# EAGLE board 2019-11-10_03-39-04 (EAGLE 6.4)
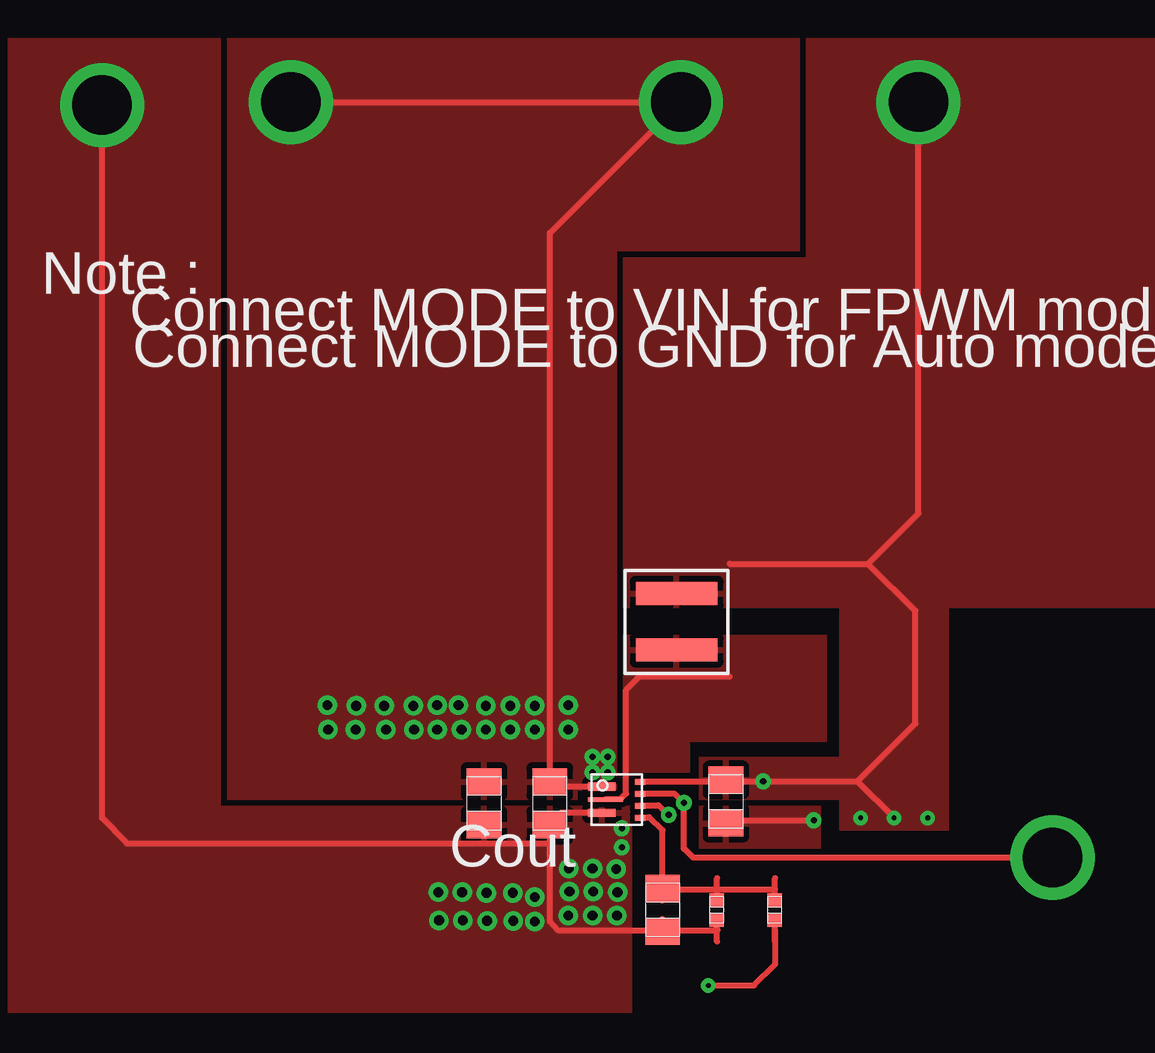
[diagram p0: board, top side]
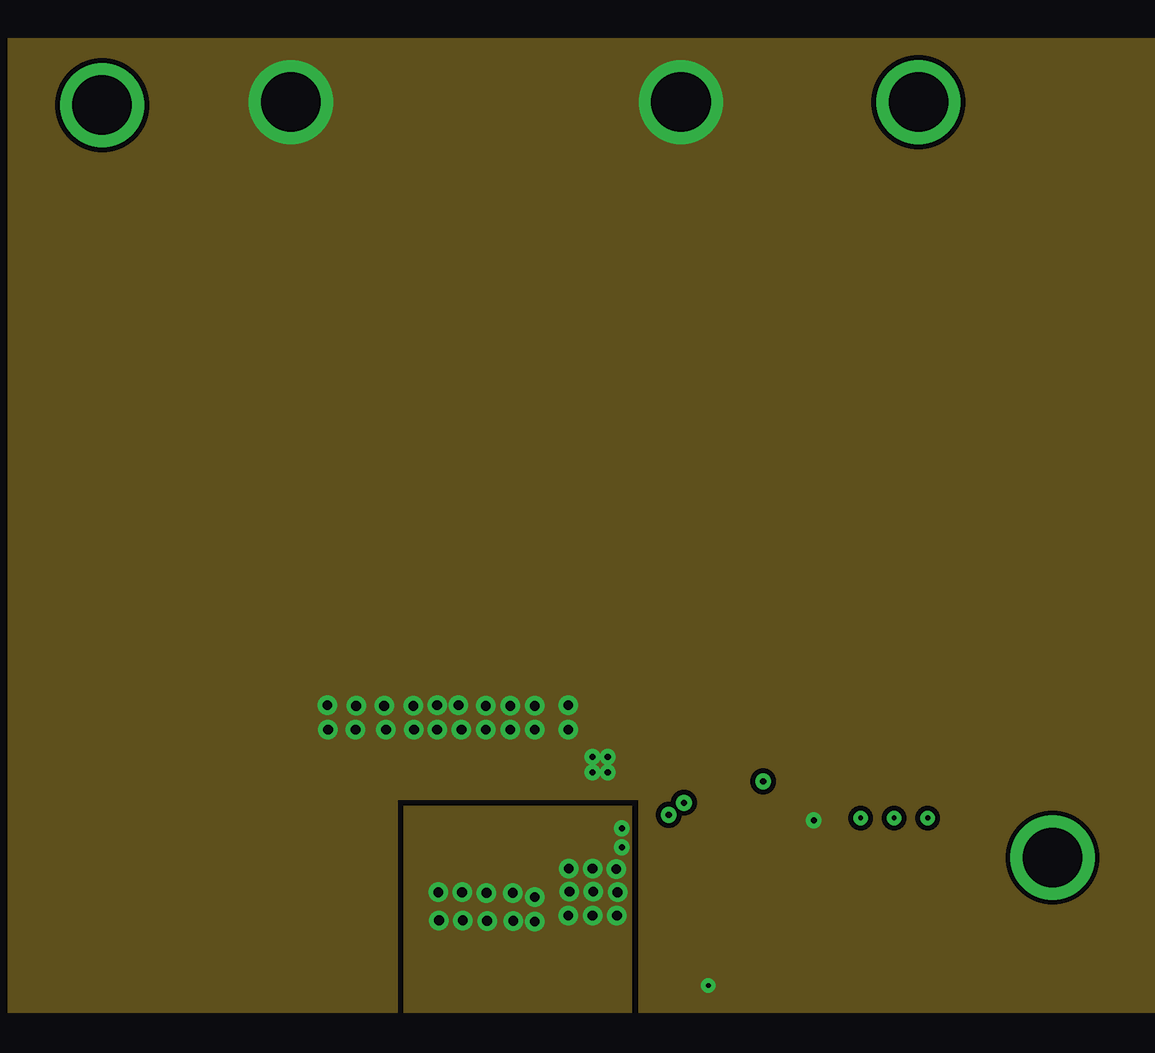
[diagram p1: board, inner layer INTERNAL1]
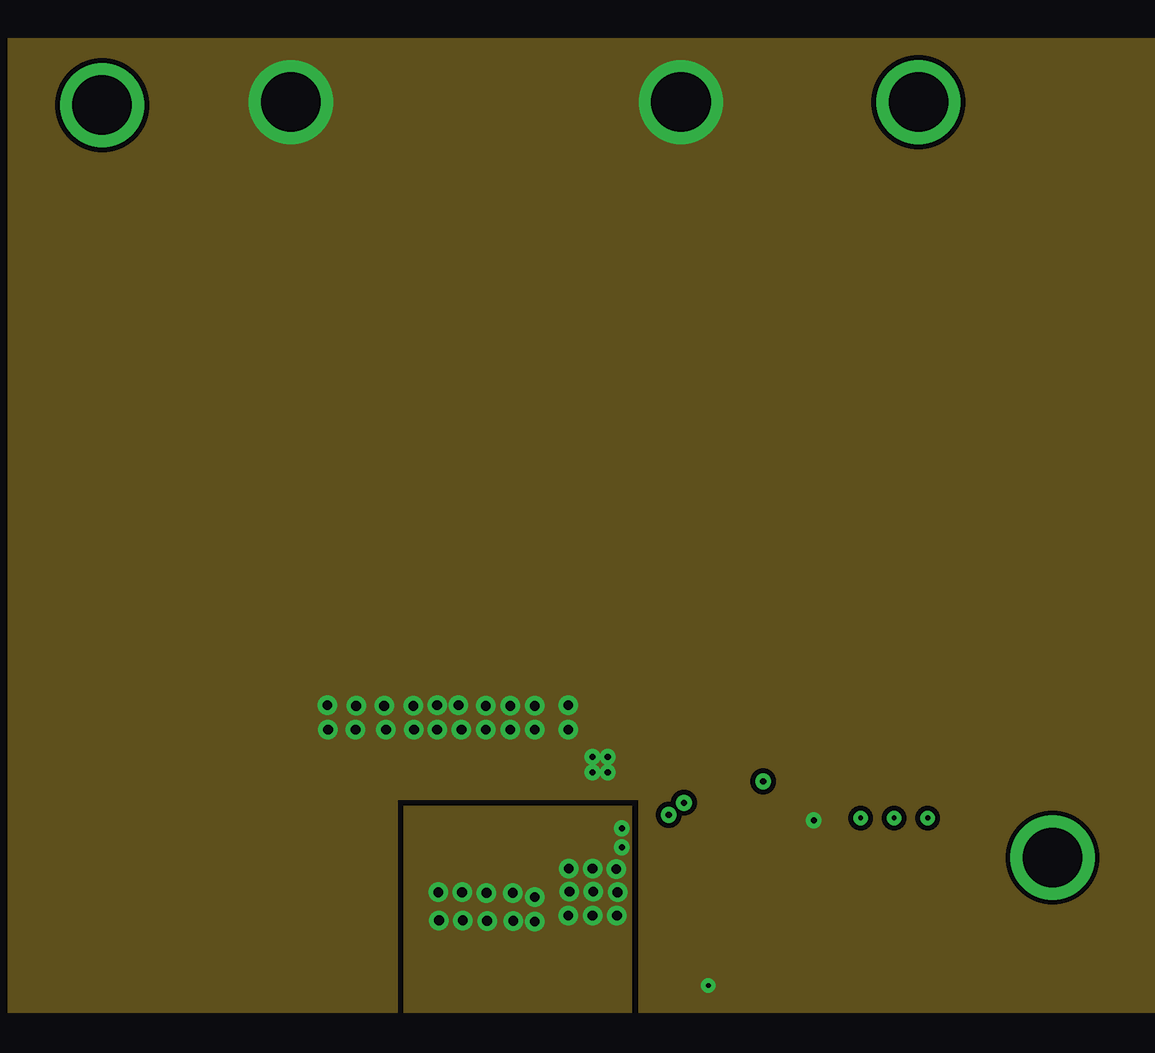
[diagram p2: board, inner layer INTERNAL2]
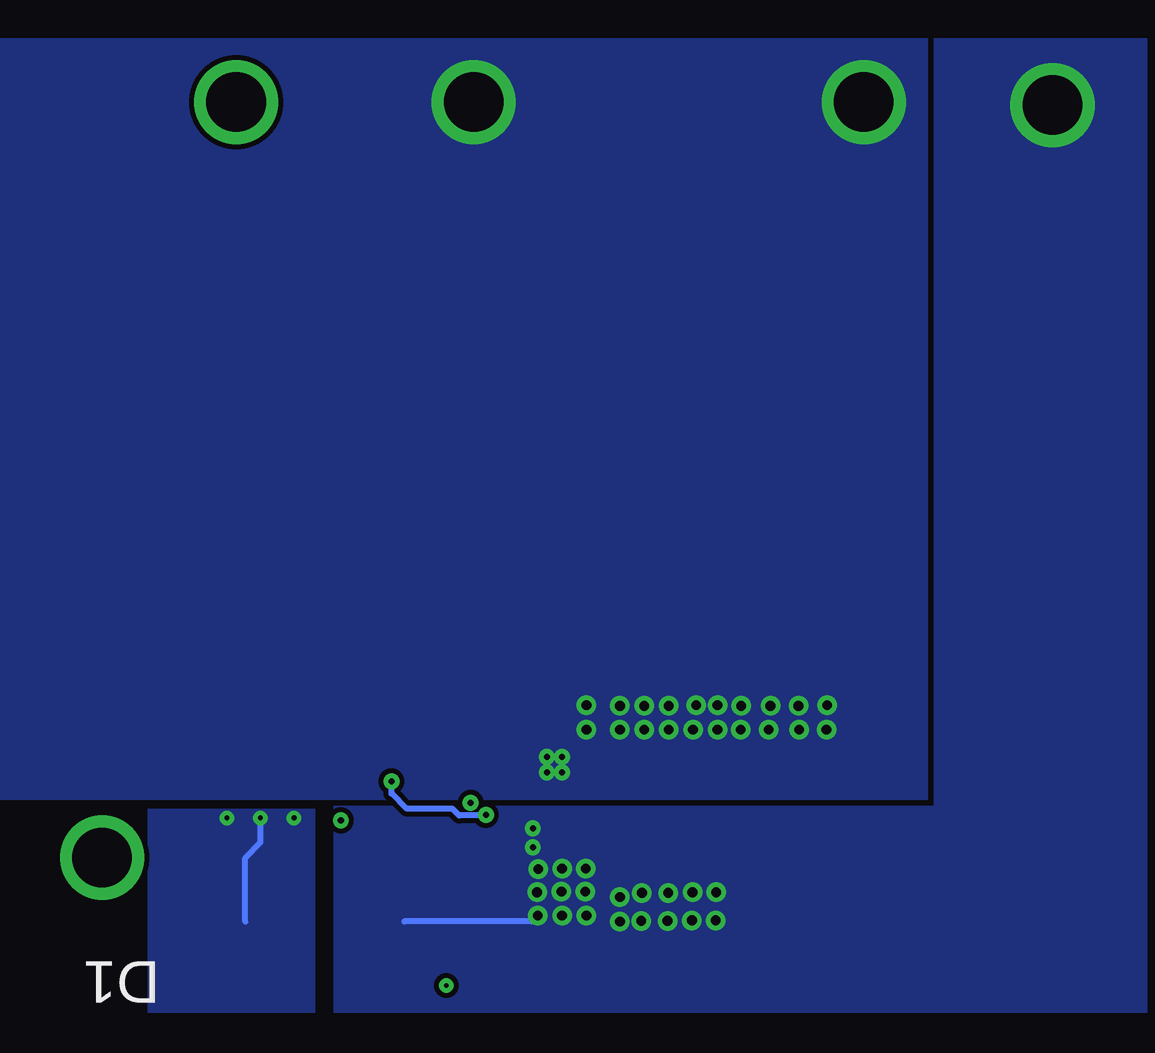
[diagram p3: board, bottom side, seen from below]

No outline drawn. Coordinates in mm, seen from the top.
Copper layers ((1*2)+(15*16)): TOP / INTERNAL1 / layer 15 / BOTTOM

## Footprints (pad centres in the part's own frame; a part is rotated, then mirrored left to right if it is on the bottom)
0805 = smd 1.118 x 1.448: 1 -0.902,0; 2 0.902,0
TP-1502 = drill 0.813 round: 1 0,0
XFL4020 = smd 0.965 x 3.404: 1 -1.181,0; 2 1.181,0
0402 = smd 0.559 x 0.61: 1 -0.419,0; 2 0.419,0
RWU0007A = smd 1.15 x 0.35: 1 -0.625,0.55; 3 -0.625,-0.55 | smd 1.45 x 0.2: 2 -0.475,0 | smd 0.45 x 0.25: 4 0.975,-0.75; 5 0.975,-0.25; 6 0.975,0.25; 7 0.975,0.75

## Placement (x,y rotation side)
Cff  [0805]  57.78,32.23 90 top
Cin  [0805]  60.43,36.75 270 top
Cout_1  [0805]  53.09,36.68 90 top
Cout_2  [0805]  50.34,36.68 90 top
GND  [TP-1502]  58.55,65.89 180 top
GND1  [TP-1502]  42.27,65.89 180 top
L1  [XFL4020]  58.37,44.25 270 top
MODE  [TP-1502]  74.02,34.39 0 top
Rfbb  [0402]  62.46,32.23 270 top
Rfbt  [0402]  60.05,32.23 90 top
U1  [RWU0007A]  55.88,36.83 0 top
VIN  [TP-1502]  68.43,65.89 180 top
VOUT  [TP-1502]  34.39,65.79 180 top

## Library data of the parts
Cff = ultra-librarian; RefDes: Cff; Type: C0805C475K8PACTU
Cin = ultra-librarian; RefDes: Cin; Type: C0805C106K8PACTU
Cout_1 Cout_2 = ultra-librarian
GND = ultra-librarian; RefDes: GND; Type: TP-1502
GND1 = ultra-librarian; RefDes: GND1; Type: TP-1502
L1 = ultra-librarian; RefDes: L1; Type: XFL4020-102MEB
MODE = ultra-librarian; RefDes: MODE; Type: TP-1502
Rfbb = ultra-librarian; RefDes: Rfbb; Type: CRCW0402100KFKED
Rfbt = ultra-librarian; RefDes: Rfbt; Type: CRCW0402732KFKED
U1 = ultra-librarian; RefDes: U1; Type: TPS61022RWUR
VIN = ultra-librarian; RefDes: VIN; Type: TP-1502
VOUT = ultra-librarian; RefDes: VOUT; Type: TP-1502

## Nets
0: Cin.2 Cout_1.2 Cout_2.2 GND1.1 GND.1 Rfbb.2 U1.1
2: Cin.1 L1.1 U1.5 U1.7 VIN.1
3: Cff.2 Rfbb.1 Rfbt.2 U1.4
5: Cff.1 Cout_1.1 Cout_2.1 Rfbt.1 U1.3 VOUT.1
8: MODE.1 U1.6
12: L1.2 U1.2

## Tracks (layer width: path | path; a pad name or v marks a point on that pad's centre or on a via)
0  (via drill 0.2 pad 0.51, 0.25 pad 0.51, 0.41 pad 0.81, 2.49 pad 3.48)
  TOP 0.254: U1.1 53.65,37.39 53.09,37.97 53.09,38.38 53.09,60.45 v58.55,65.91 v42.29,65.91 | v59.69,29.08 61.59,29.08 62.48,29.97 62.48,31.39 | 60.45,35.97 v64.08,35.97 | 62.47,30.91 62.47,31.85
  other vias: 55.5,37.97 49.4,39.75 53.85,39.75 47.42,39.75 51.44,39.75 43.84,39.75 55.5,38.61 47.4,40.74 51.44,40.74 53.85,40.77 49.28,40.77 43.81,40.77 54.86,37.97 50.42,39.75 48.39,39.75 46.25,39.75 52.45,39.75 44.98,39.75 54.86,38.61 45.01,40.74 46.18,40.74 48.39,40.77 52.45,40.74 50.42,40.74
  pour TOP (rank 6): 54.23,37.21 54.23,36.83 39.62,36.83 39.62,68.58 63.5,68.58 63.5,59.69 55.88,59.69 55.88,37.21
  pour TOP (rank 6): 59.31,34.8 59.31,36.58 64.39,36.58 64.39,34.8
  pour BOTTOM (rank 5): 78.74,36.83 39.62,36.83 39.62,68.58 78.74,68.58
  pour INTERNAL2 (rank 4): 56.77,27.94 56.77,36.83 46.74,36.83 46.74,27.94 30.48,27.94 30.48,68.58 78.74,68.58 78.74,27.94
  pour INTERNAL1 (rank 5): 56.77,27.94 56.77,36.83 46.74,36.83 46.74,27.94 30.48,27.94 30.48,68.58 78.74,68.58 78.74,27.94
2  (via drill 0.2 pad 0.51, 0.25 pad 0.51, 2.49 pad 3.48)
  TOP 0.254: 60.48,37.59 v61.98,37.59 65.91,37.59 | 65.91,37.59 v67.44,36.07 | v58.04,36.2 57.61,36.6 56.87,36.6 | 56.87,37.59 60.45,37.59 | 66.34,46.66 68.33,44.7 68.33,40.01 65.91,37.59 | 60.58,46.66 66.34,46.66 | v68.45,65.91 68.45,48.77 66.34,46.66
  BOTTOM 0.254: v61.98,37.59 61.98,37.08 61.34,36.45 59.44,36.45 59.16,36.17 58.06,36.17 v58.04,36.2 | v67.44,36.07 67.44,35.05 68.07,34.39 68.07,31.75
  other vias: 66.04,36.07 68.83,36.07
  pour TOP (rank 3): 65.15,38.61 59.31,38.61 59.31,36.83 65.15,36.83 65.15,35.56 69.72,35.56 69.72,44.83 78.74,44.83 78.74,68.58 63.75,68.58 63.75,59.44 56.13,59.44 56.13,44.83 65.15,44.83
  pour BOTTOM (rank 2): 65.15,36.45 72.14,36.45 72.14,27.94 65.15,27.94
3
  TOP 0.254: 62.48,33.1 | 62.48,33.1 60.07,33.1 57.78,33.1 57.78,35.56 57.23,36.09 56.87,36.09 | 57.77,32.61 57.77,33.55 | 60.06,32.61 60.06,33.55 | 62.47,32.61 62.47,33.55
5  (via drill 0.25 pad 0.51, 0.41 pad 0.76, 2.49 pad 3.48)
  TOP 0.254: 55.96,34.92 56.13,34.75 | 60.07,31.39 57.78,31.39 53.42,31.39 53.09,31.75 53.09,35 | 55.27,36.3 53.57,36.3 53.09,35.81 53.09,35 | 53.09,35 35.46,35 34.42,36.07 v34.42,65.79 34.42,65.91 | 57.77,30.91 57.77,31.85 | 60.06,30.91 60.06,31.85
  BOTTOM 0.254: 61.44,31.75 56.13,31.75 v55.88,32
  other vias: 55.85,33.93 53.85,32 51.56,31.78 49.45,31.8 53.87,33.96 55.91,32.97 51.54,32.94 49.43,32.97 53.9,32.99 54.86,32 54.86,33.96 52.45,32.77 52.45,31.75 50.47,31.78 48.46,31.8 50.44,32.94 48.44,32.97 54.89,32.99 56.08,35.64 56.08,34.85
  pour TOP (rank 3): 39.37,36.58 39.37,68.58 30.48,68.58 30.48,27.94 56.52,27.94 56.52,36.58
  pour BOTTOM (rank 2): 64.39,27.94 64.39,36.58 39.37,36.58 39.37,68.58 30.48,68.58 30.48,27.94
  pour INTERNAL2: 56.52,36.58 46.99,36.58 46.99,27.94 56.52,27.94
  pour INTERNAL1: 46.99,27.94 46.99,36.58 56.52,36.58 56.52,27.94
8  (via drill 0.25 pad 0.51, 2.49 pad 3.48)
  TOP 0.254: v74.04,34.42 59.05,34.42 58.67,34.8 v58.67,36.7 58.27,37.08 56.87,37.08
12
  TOP 0.254: 55.42,36.85 56.03,36.85 56.26,37.08 56.26,41.4 56.82,41.96 60.58,41.96
  pour TOP (rank 4): 64.64,43.69 64.64,39.24 58.93,39.24 58.93,37.97 56.13,37.97 56.13,43.69

## Text on the board
ASSYNOTES: Note : | Connect MODE to VIN for FPWM mode | Connect MODE to GND for Auto mode | Cout
bDocu: D1